# Altium PCB ife18_TS_AIL_Buck.PcbDoc
Units mm, origin at the board's own origin, x right, y up, seen from the top; angles counter-clockwise.
Board outline 38 x 25.4 mm, 2 copper layers (Top Layer, Bottom Layer); 13 components, 13 nets, 44 pads, 8 vias.
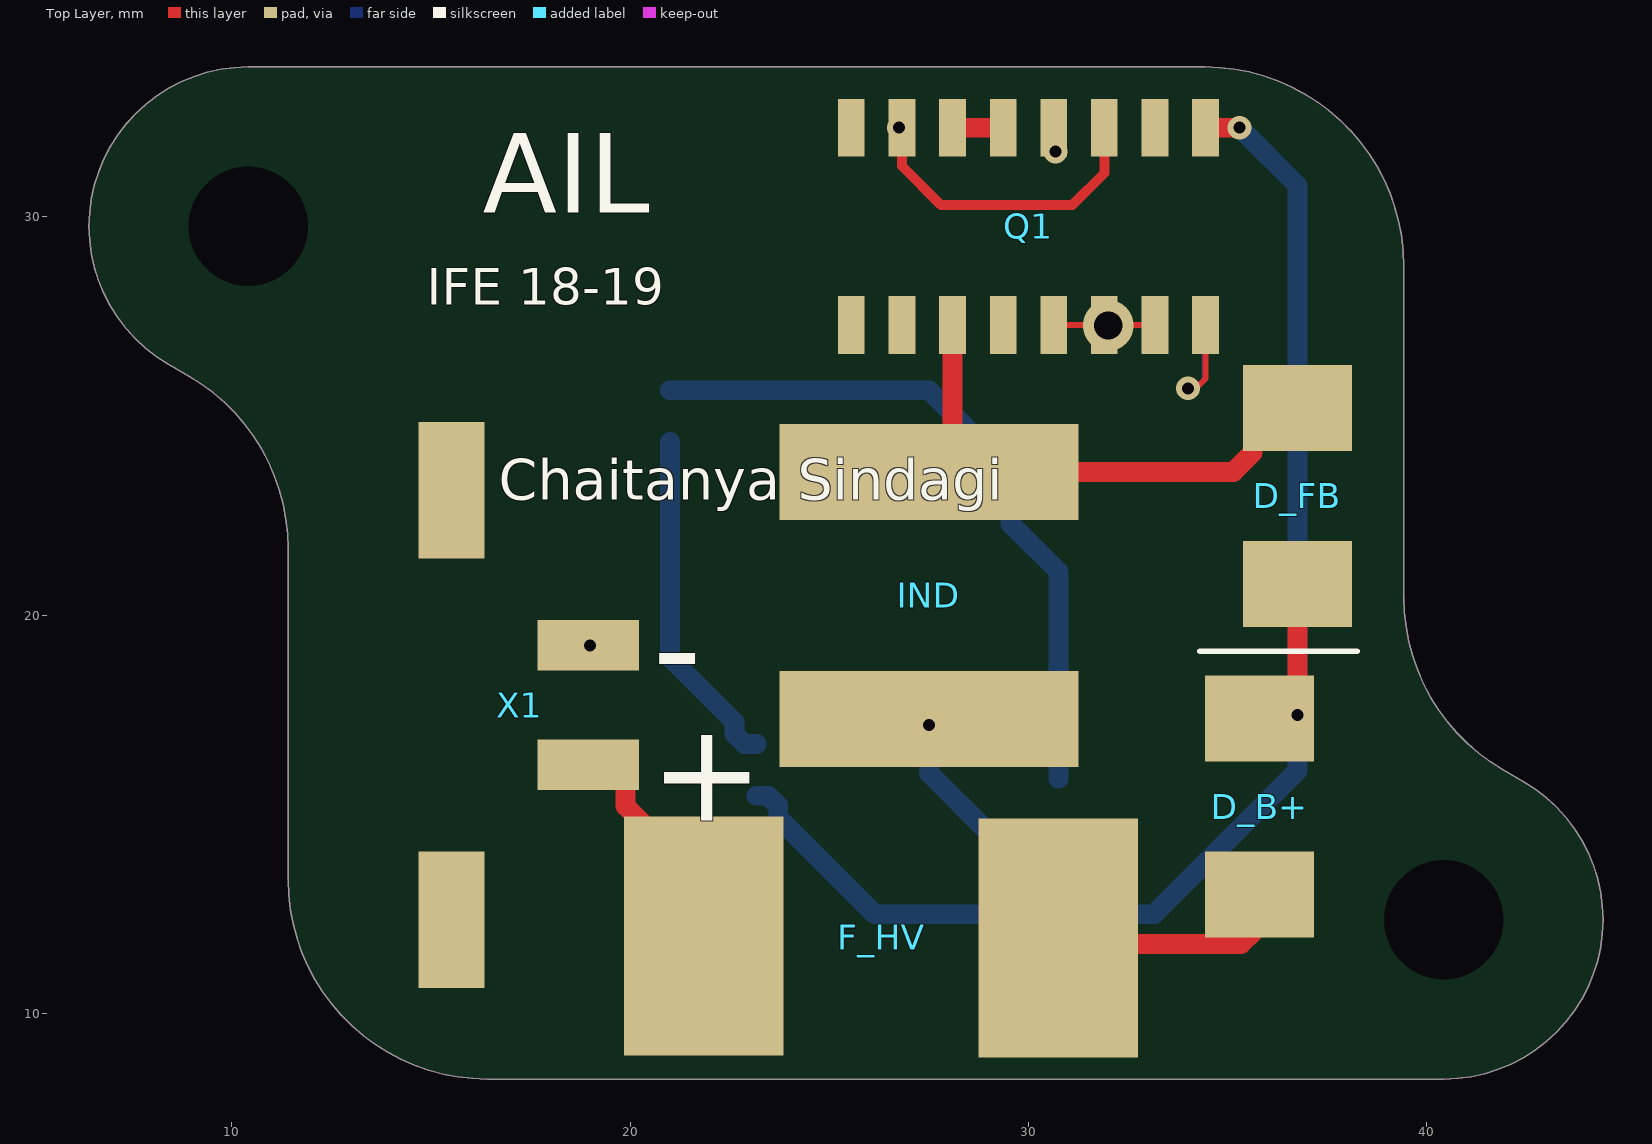
[diagram p0: Top Layer view]
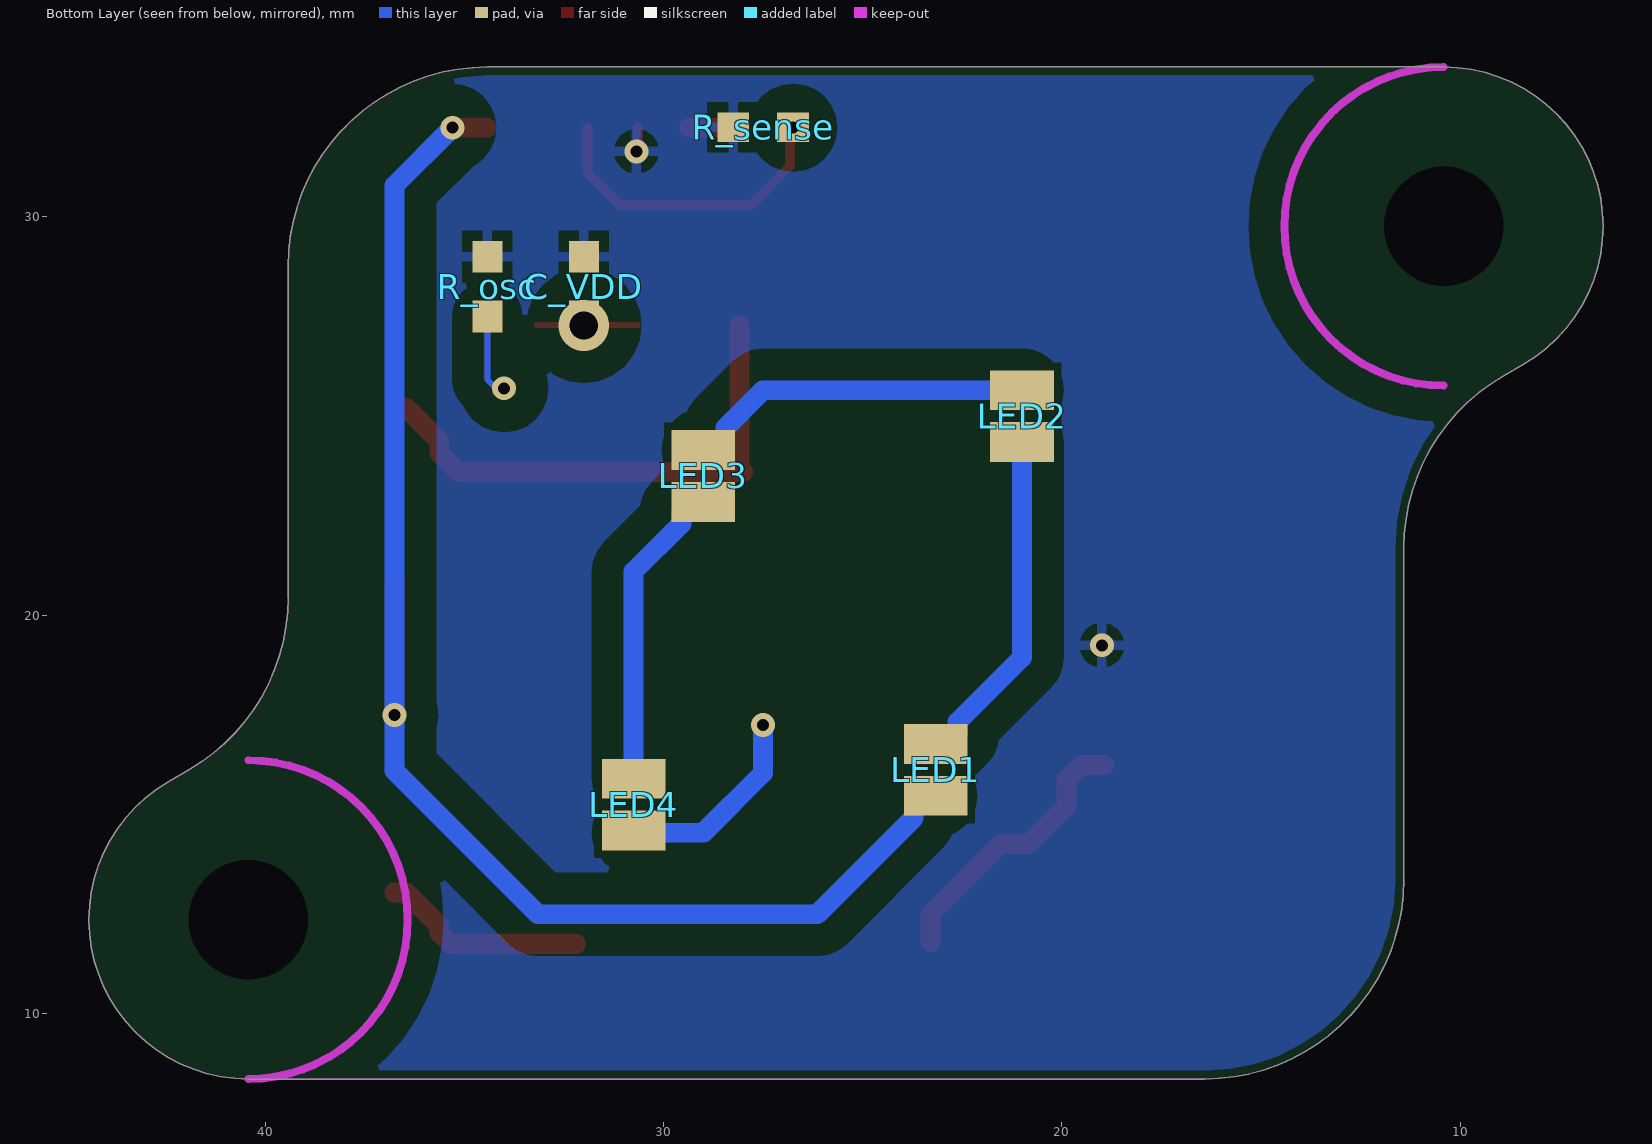
[diagram p1: Bottom Layer view, seen from below]
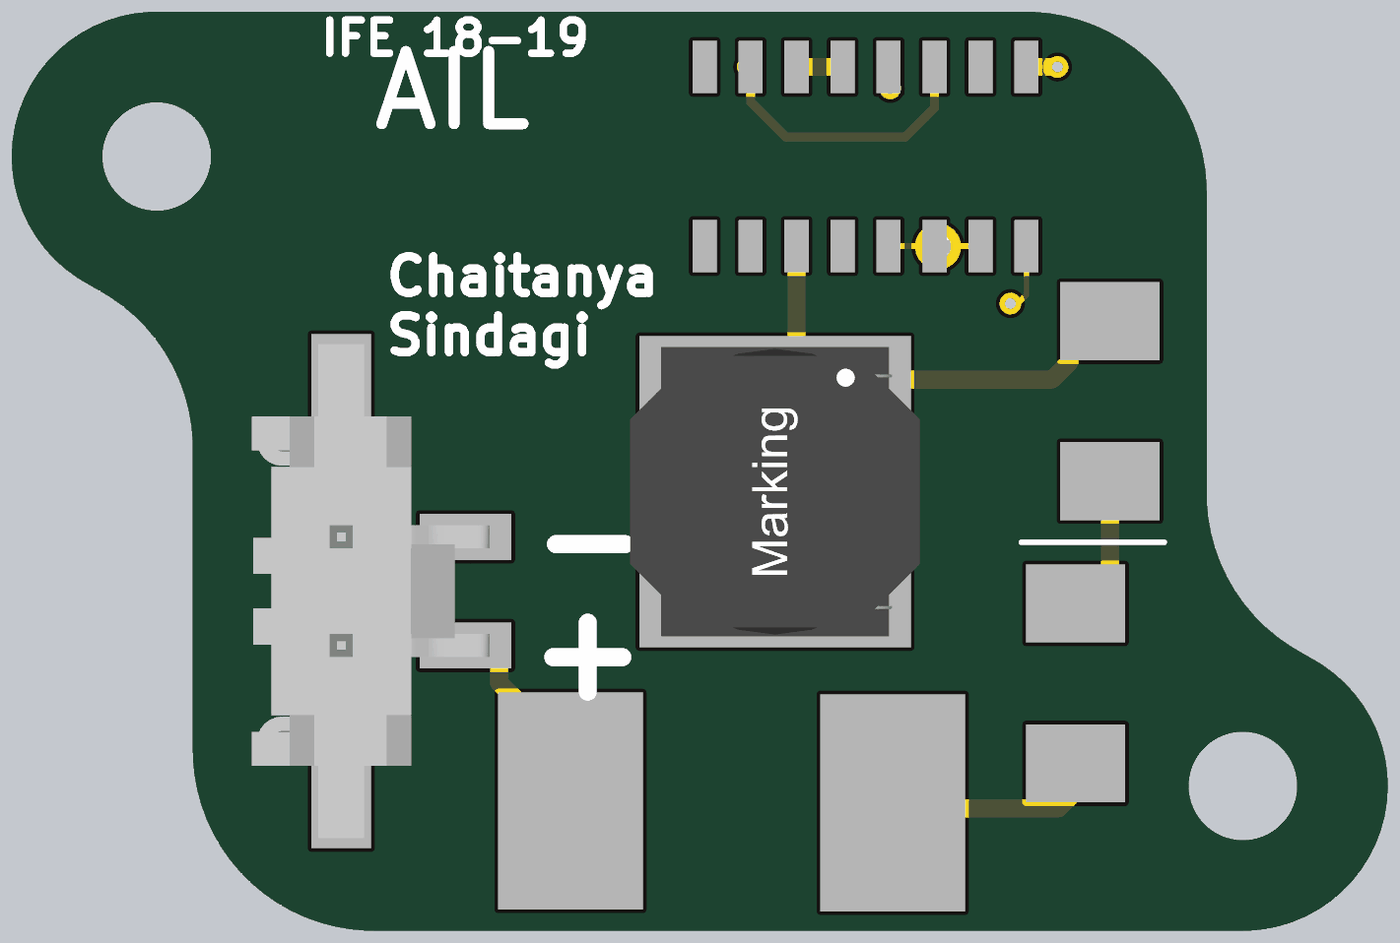
[diagram p2: 3D render of the assembled board from above, using the file's embedded part models]
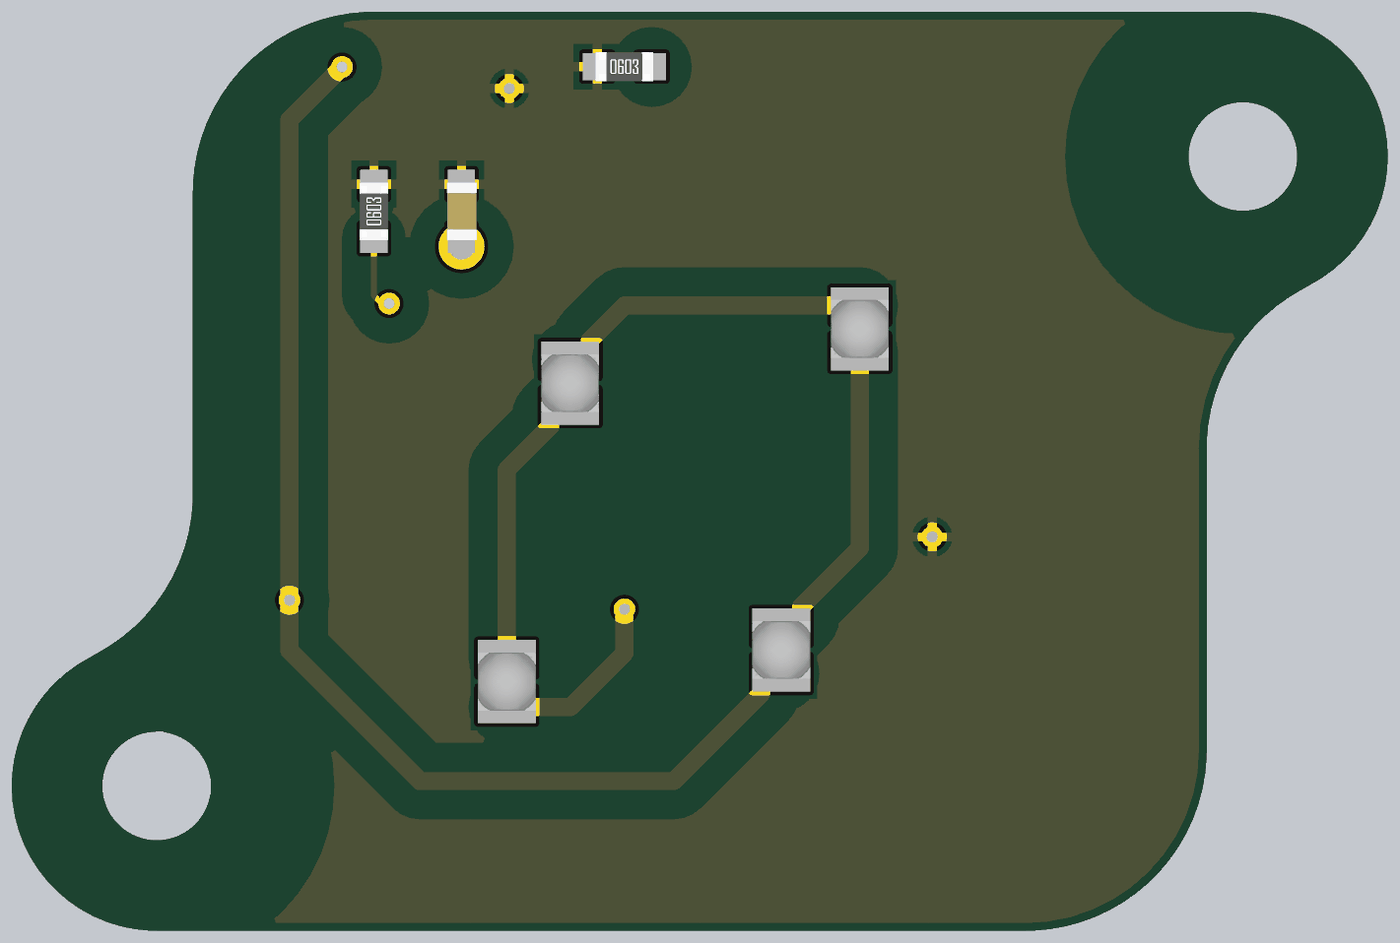
[diagram p3: 3D render of the assembled board from below, using the file's embedded part models]

## Layer stack, top to bottom
Top Solder: solder mask 0.0102, Solder Resist, Dk 3.5
Top Layer: signal copper 0.0356
Dielectric 1: dielectric 0.32, FR-4, Dk 4.8
Bottom Layer: signal copper 0.0356
Bottom Solder: solder mask 0.0102, Solder Resist, Dk 3.5

## Board outline
11.42,13.364 11.42,21.68 ccw(c6.42,21.68) 8.929,26.005 8.413,26.304 cw(c10.42,29.764) 10.42,33.764 34.42,33.764 cw(c34.42,28.764) 39.42,28.764 39.42,20.449 ccw(c44.42,20.449) 41.911,16.124 42.427,15.825 cw(c40.42,12.364) 40.42,8.364 16.42,8.364 cw(c16.42,13.364)

## Design rules (kind name [scope] priority, off if disabled: settings)
BoardOutlineClearance [All] p1: gap=0.2 ignorepadtopadclearanceinfootprint=FALSE
Clearance "Board Clearance" [(IsPad OR OnLayer('Keep-Out Layer'))] p1: gap=0.2 ignorepadtopadclearanceinfootprint=TRUE
Clearance [All] p2: gap=0.8 ignorepadtopadclearanceinfootprint=TRUE
PolygonConnect "Inductor Plane" [InNet('NetD_FB_A')] p1: connectstyle=Direct reliefconductorwidth=0.254 reliefentries=4 polygonreliefangle="90 Angle" airgapwidth=0.254
PolygonConnect Polygons [All] p2: connectstyle=Relief reliefconductorwidth=0.254 reliefentries=4 polygonreliefangle="90 Angle" airgapwidth=0.254
RoutingVias [All] p1: holewidth=0.3 width=0.6 viastyle="Through Hole" minholewidth=0.3 minwidth=0.6 maxholewidth=6.3 maxwidth=10
SolderMaskExpansion [All] p1: expansion=0.102
Width [All] p1: maxlimit=0.5 minlimit=0.152 preferedwidth=0.25
30 further rules are at their usual default settings.

## Components (designator, comment, footprint, x,y, rotation, side; value= is the part's Value field where it differs from the comment)
C_VDD "1u" CAP-0603 32,28.25 r270 bottom
D_B+ "40V" SMB 35.8,15.2 r270 top
D_FB "?" SMB 36.75,23 r90 top
F_HV "1A" FUSE_885 26.3,11.9 r180 top
IND "2.2mH" IND-8080 27.5,20.5 r90 top
LED1 "LED XQA Red" LED_XQARED 23.17,16.124 r90 bottom
LED2 "LED XQA Red" LED_XQARED 21,25 r90 bottom
LED3 "LED XQA Red" LED_XQARED 29,23.5 r270 bottom
LED4 "LED XQA Red" LED_XQARED 30.75,15.25 r270 bottom
Q1 "?" SO-16 30,29.764 r0 top
R_osc "1M" RES-0603 34.42,28.25 r90 bottom
R_sense "2" RES-0603 27.5,32.25 r180 bottom
X1 "Molex - Micro-Fit 3.0 Series connector,  3.00mm (0.118\") pitch header, 2 positions." 43650-0224 15.52,17.75 r270 top

## Footprints (in the part's own frame and the unit in brackets; to place one, negate y for a bottom-side part, rotate by r counter-clockwise, add the part's x,y. Pads: shape width x height; smd on the part's side, far side on the other; paste and mask are expansions set on the pad)
43650-0224 [mm]
  rect 1.27x2.54 smd: P$1(1.5,3.43) P$2(-1.5,3.43)
  rect 3.43x1.65 smd: TAB1(5.39,0) TAB2(-5.39,0)
  body extent -6.82,-2.47 6.83,4.1, height 9.95
CAP-0603 [mm]
  rect 0.8x0.75 smd: 1(-0.75,0) 2(0.75,0)
  body extent -0.8,-0.4 0.8,0.42, height 0.81
FUSE_885 [mm]
  rect 4x6 smd: 1(-4.45,0) 2(4.45,-0.05)
  body extent -5.45,-2.4 5.45,2.4, height 4.95
IND-8080 [mm]
  rect 2.4x7.5 smd: 1(-3.1,0) 2(3.1,0)
  body extent -4,-4 4,4, height 6.52
LED_XQARED [mm]
  rect 1x1.6 smd: A(-0.65,0) K(0.65,0)
  body extent -0.8,-0.8 0.8,0.8, height 1.56
RES-0603 [mm]
  rect 0.8x0.75 smd: 1(-0.75,0) 2(0.75,0)
  body extent -0.8,-0.4 0.8,0.4, height 0.44
SMB [mm]
  rect 2.159x2.743 smd: A(2.21,0) K(-2.21,0)
  silkscreen extent -3.9,-1.5 -3.9,1.5, body extent -2.79,-1.97 2.8,1.97, height 2.5
SO-16 [mm]
  rect 0.67x1.45 smd: 1(-4.445,-2.475) 2(-3.175,-2.475) 3(-1.905,-2.475) 4(-0.635,-2.475) 5(0.635,-2.475) 6(1.905,-2.475) 7(3.175,-2.475) 8(4.445,-2.475) 9(4.445,2.475) 10(3.175,2.475) 11(1.905,2.475) 12(0.635,2.475) 13(-0.635,2.475) 14(-1.905,2.475) 15(-3.175,2.475) 16(-4.445,2.475)
  body extent -4.98,-3.07 4.99,3.07, height 1.78

## Part data
C_VDD: library part CAP-0603
D_B+ D_FB: library part DIODE-SMB
F_HV: library part FUSE_885
IND: library part IND-8080
LED1 LED2 LED3 LED4: library part LED_XQARED
Q1: library part IC-SO16_AL9901_1
R_osc R_sense: library part RES-0603
X1: library part POS2_MF43650-0224, Package=43650-0224, DeviceName=43650-0224, DeviceSetName=HEADER_POS2_?, GateName_1=G$1, LibraryName="MOLEX Micro-Fit", SymbolName_1=HEADER_POS2

## Free pads (board coordinates)
  round 2 hole 3 unplated: H1(10.42,29.764) H2(40.42,12.364)

## Via types
v1: diameter 0.6, hole 0.3, Top Layer to Bottom Layer, 7 vias
v2: diameter 1.27, hole 0.711, Top Layer to Bottom Layer, 1 vias

## Nets (pads, with @x,y where several pads share a name; then routed paths per layer and width w, separated by ;. In a path a pad name is that pad's centre, name@x,y a point inside that pad or via, vN(x,y) a via of type N, cw(c..) or ccw(c..) an arc to the next point about the centre after c; other vN are vias at no path point)
GND: C_VDD.1 Q1.12 R_osc.2 R_sense.1 X1.P$2 | length 0.7
  Top Layer w0.25: X1.P$2 v1(19,19.25) ; Q1.12 30.635,31.69 v1(30.68,31.645)
NetC_VDD_2: C_VDD.2 Q1.5 Q1.6 Q1.7 | length 2.6
  Top Layer w0.152: Q1.5 Q1.6 Q1.6@31.987,27.289 ; v2(32,27.276) Q1.6@31.987,27.289 ; Q1.7 Q1.6@31.987,27.289
NetD_B+_A: D_B+.A F_HV.1 | length 5.2
  Top Layer w0.5: F_HV.1@32.2,11.75 35.336,11.75 35.628,12.043 35.628,12.21 36.458,13.04 D_B+.A@36.75,13.04
NetD_B+_K: D_B+.K D_FB.K LED1.A Q1.9 | length 37.4
  Top Layer w0.5: Q1.9 v1(35.3,32.239) ; v1(36.75,17.5) D_FB.K
  Bottom Layer w0.5: LED1.A 23.47,15.474 23.72,15.224 23.72,14.924 26.144,12.5 33.15,12.5 36.75,16.1 v1(36.75,17.5) 36.75,30.789 v1(35.3,32.239)
NetD_FB_A: D_FB.A IND.2 Q1.3 | length 13.3
  Top Layer w0.5: Q1.3 28.095,23.695 28,23.6 35.14,23.6 35.628,24.088 35.628,24.38 36.458,25.21 D_FB.A
NetF_HV_2: F_HV.2 X1.P$1 | length 7
  Top Layer w0.5: X1.P$1 19.498,16.25 19.883,15.865 19.883,15.217 20.843,14.257 21.55,14.257 23.3,12.507 F_HV.2@23.3,11.8
NetIND_1: IND.1 LED4.K | length 5.2
  Top Layer w0.152: v1(27.5,17.25) IND.1
  Bottom Layer w0.5: v1(27.5,17.25) 27.5,16.044 29,14.544 LED4.K@30.75,14.544
NetLED1_K: LED1.K LED2.A | length 8.7
  Bottom Layer w0.5: LED2.A 21,18.944 22.62,17.324 22.62,17.024 22.87,16.774 LED1.K
NetLED2_K: LED2.K LED3.A | length 8.8
  Bottom Layer w0.5: LED2.K 27.5,25.65 28.45,24.7 28.45,24.4 28.7,24.15 LED3.A
NetLED3_K: LED3.K LED4.A | length 7.9
  Bottom Layer w0.5: LED3.K 29.3,22.85 29.55,22.6 29.55,22.3 30.75,21.1 LED4.A
NetQ1_8: Q1.8 R_osc.1 | length 4
  Top Layer w0.152: v1(34,25.7) 34.2,25.7 34.445,25.945 Q1.8
  Bottom Layer w0.152: v1(34,25.7) 34.2,25.7 34.42,25.92 R_osc.1
NetQ1_11: Q1.11 Q1.15 R_sense.2 | length 7.9
  Top Layer w0.25: Q1.15 26.825,31.275 27.8,30.3 31.1,30.3 31.905,31.105 Q1.11
  other v1: 26.745,32.239
NetQ1_13: Q1.13 Q1.14 | length 1.3
  Top Layer w0.5: Q1.14 Q1.13
pads on no net: Q1.1 Q1.2 Q1.4 Q1.10 Q1.16 X1.TAB1 X1.TAB2

## Polygon pours and split planes (outlines as drawn)
GND on Bottom Layer "Bottom Layer-No Net" (solid, remove dead copper, pour order 2): 5.25,34.75 45,34.75 45,7.5 5.25,7.5

## Keep-outs
Bottom Layer:
  lines w0.2: 10.42,25.764 ccw(c10.42,29.764) 14.42,29.764 ccw(c10.42,29.764) 10.42,33.764 ; 40.42,8.364 cw(c40.42,12.364) 36.42,12.364 cw(c40.42,12.364) 40.42,16.364
Keep-Out Layer:
  the board outline again, w0.02

## Silkscreen, mask and mechanical layers (free items; w line width, h text height)
Top Overlay:
  text "AIL" at 16.3,30.1 h2
  text "IFE 18-19" at 14.9,27.8 h0.91
  text "Chaitanya Sindagi" at 16.7,22.9 h1.02
  text "-" at 20.575,17.975 h2.5
  text "+" at 20.5,14.85 h2.5

## Dimensions
11.42,21.68 to 39.42,20.449 on Measurements (Mech8)
34.42,33.764 to 40.42,8.364 on Measurements (Mech8)
40.42,12.364 to 10.42,29.764 on Measurements (Mech8)
10.42,29.764 to 40.42,12.364 on Measurements (Mech8)